# Altium PCB PCB2.PcbDoc
Units mm, origin at the board's own origin, x right, y up, seen from the top; angles counter-clockwise.
Board outline 32 x 16 mm, 2 copper layers (Top Layer, Bottom Layer); 10 components, 14 nets, 52 pads, 9 vias.
Unrouted connection lines stored in the file: 1.
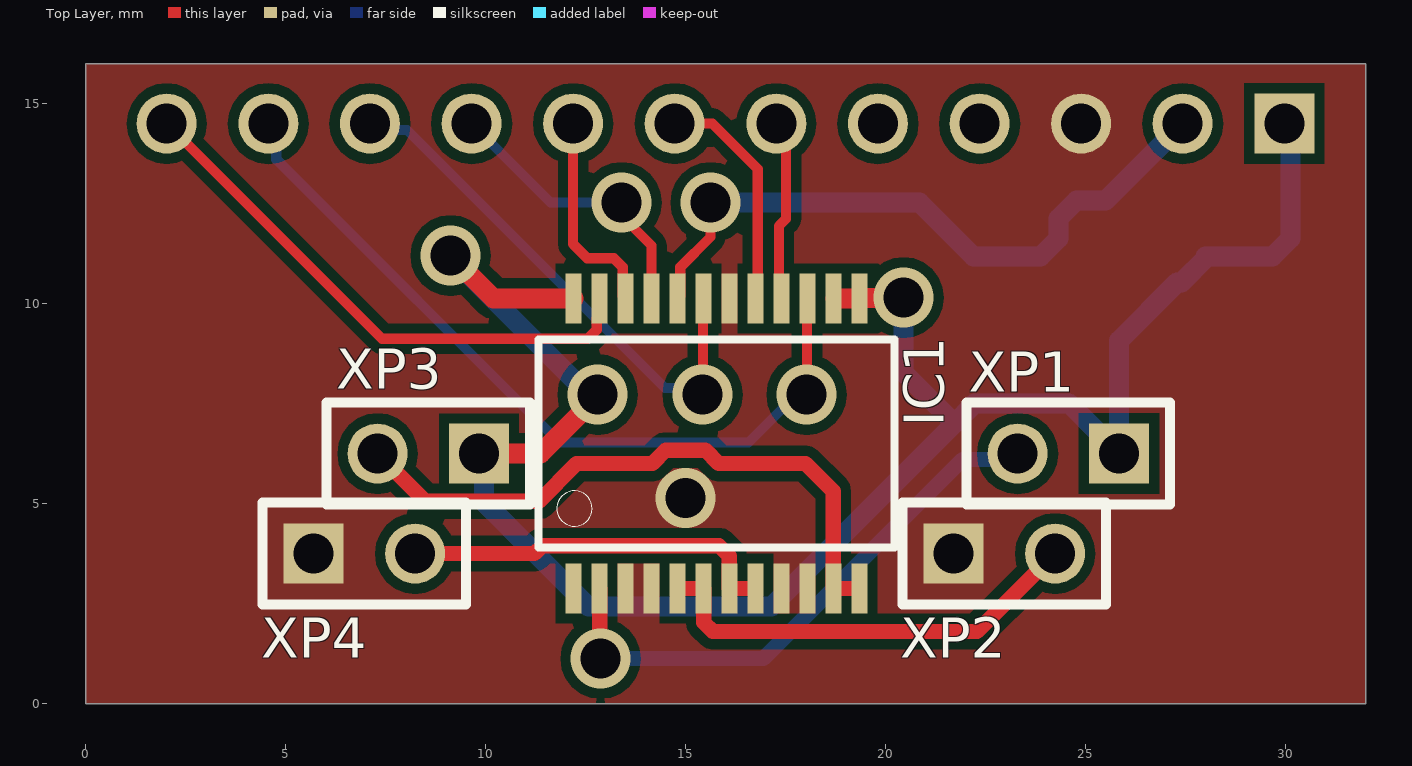
[diagram p0: Top Layer view]
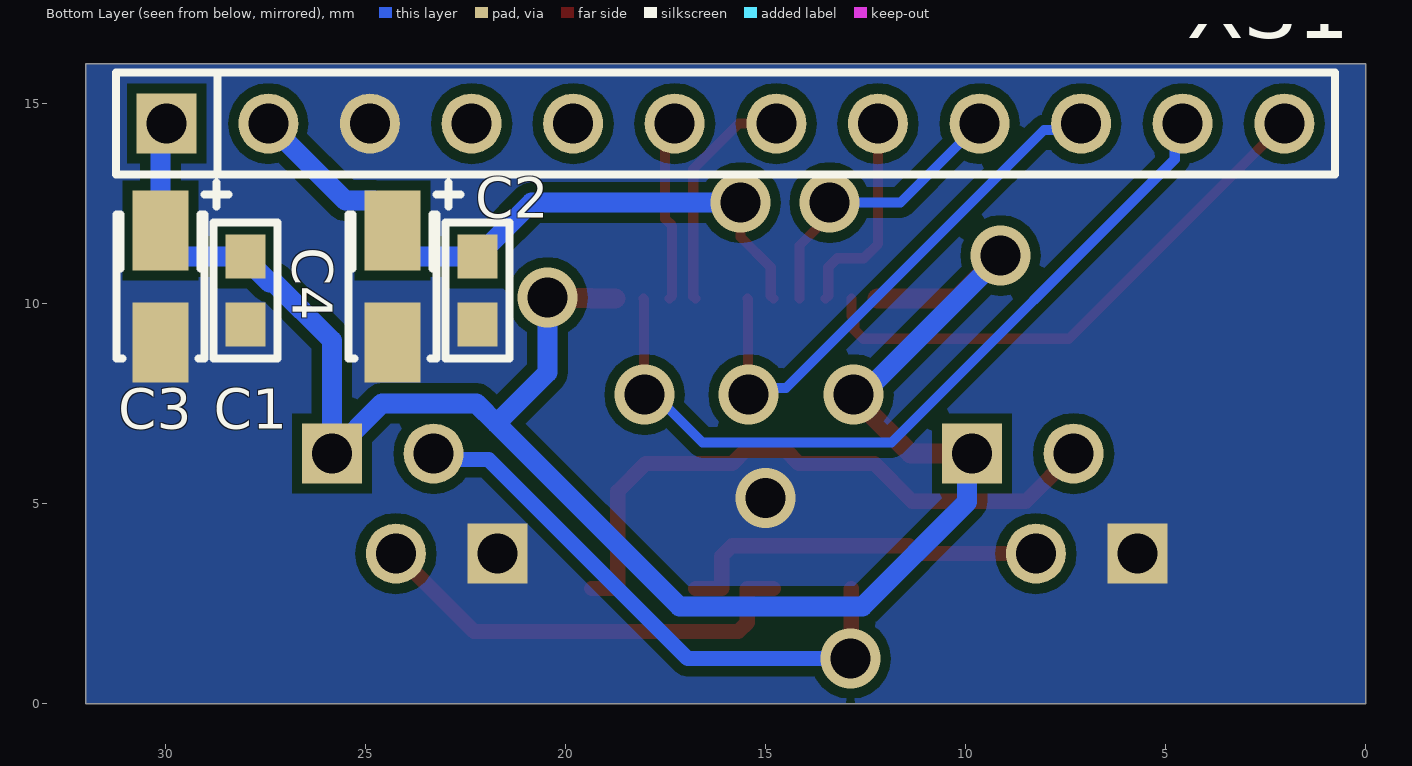
[diagram p1: Bottom Layer view, seen from below]
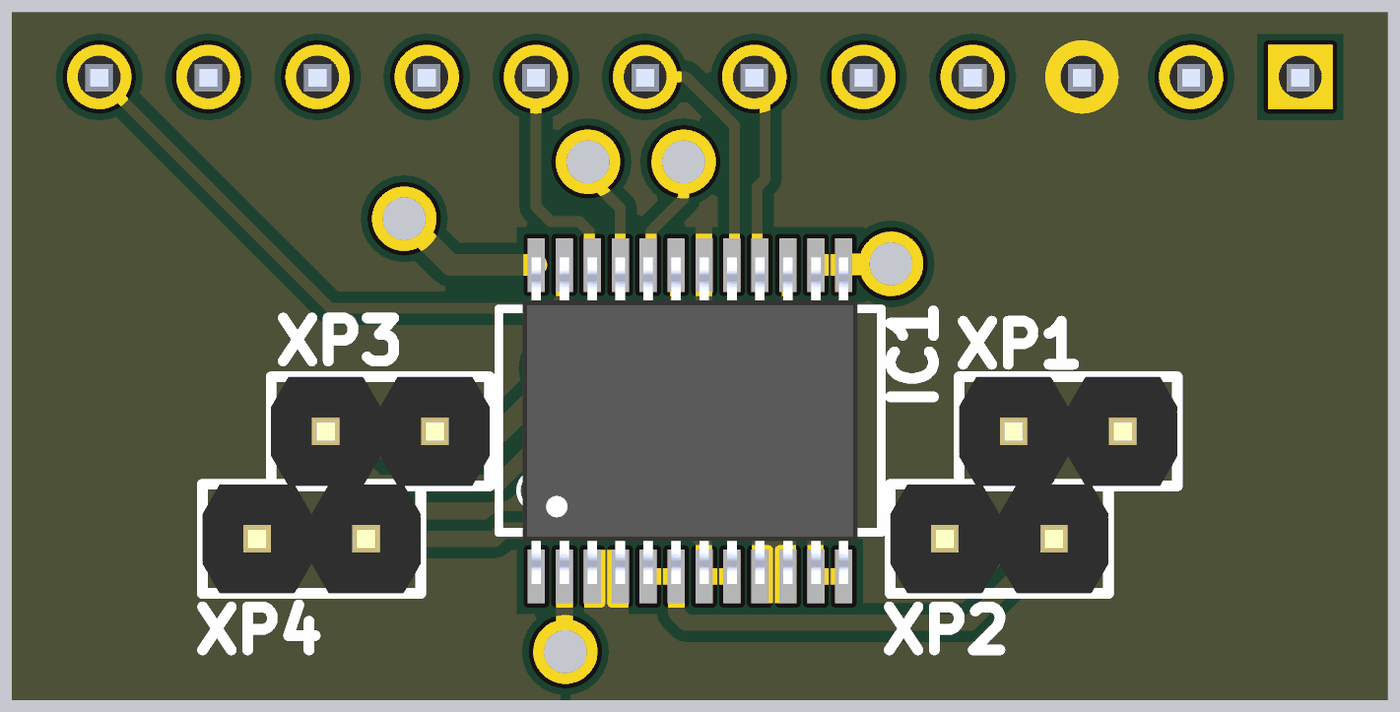
[diagram p2: 3D render of the assembled board from above, using the file's embedded part models]
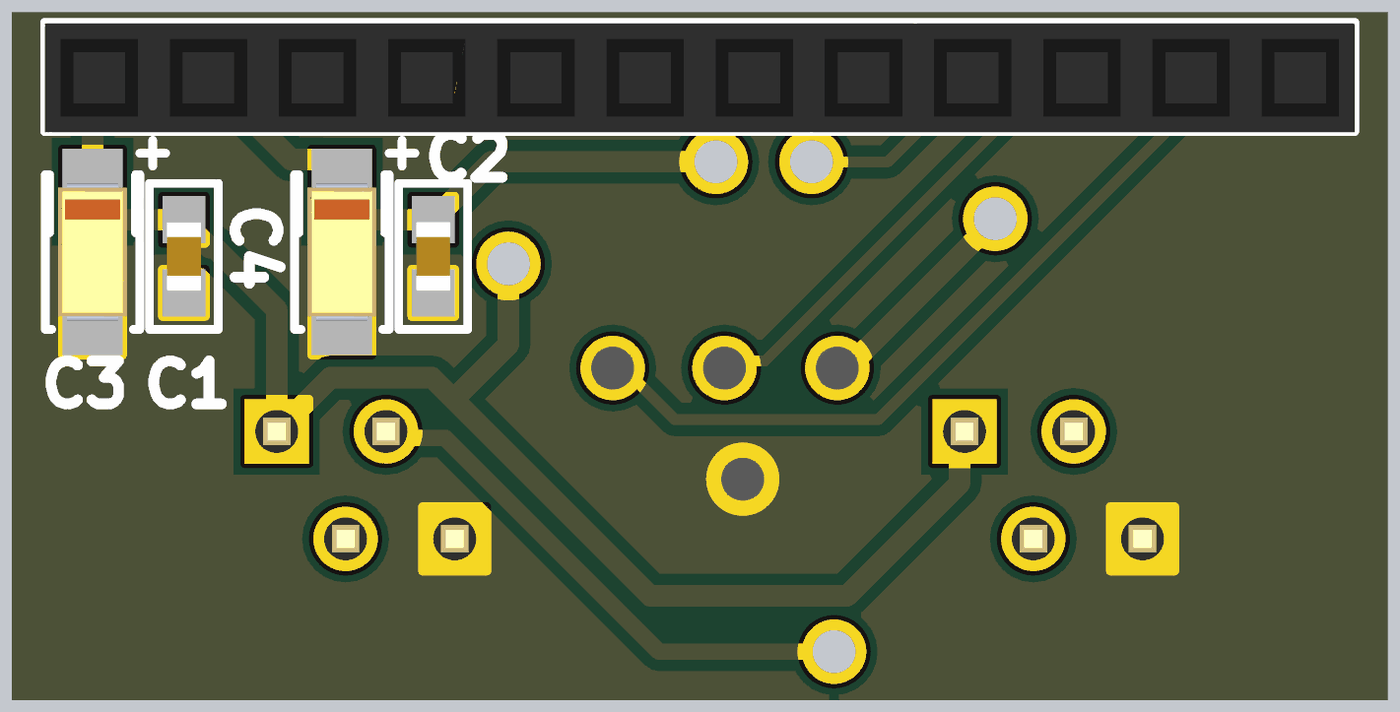
[diagram p3: 3D render of the assembled board from below, using the file's embedded part models]

## Layer stack, top to bottom
Top Solder: solder mask 0.0102, Solder Resist, Dk 3.5
Top Layer: signal copper 0.0356
Dielectric 1: dielectric 0.32, FR-4, Dk 4.8
Bottom Layer: signal copper 0.0356
Bottom Solder: solder mask 0.0102, Solder Resist, Dk 3.5

## Board outline
0,0 32,0 32,16 0,16

## Design rules (kind name [scope] priority, off if disabled: settings)
Clearance [All] p1: gap=0.254 ignorepadtopadclearanceinfootprint=FALSE except(0: Arc-Hole Track-Hole SMDPad-Hole THPad-Hole Via-Hole Fill-Hole Poly-Hole Region-Hole Text-Hole)
PolygonConnect [All] p1: connectstyle=Direct reliefconductorwidth=0.254 reliefentries=4 polygonreliefangle="90 Angle" airgapwidth=0.254
RoutingVias [All] p1: holewidth=0.711 width=1.27 viastyle="Through Hole" minholewidth=0.711 minwidth=1.27 maxholewidth=0.711 maxwidth=1.27
SolderMaskExpansion [All] p1: expansion=0.102 istentingtop=FALSE
Width [All] p1: maxlimit=0.5 minlimit=0.1 preferedwidth=0.254
30 further rules are at their usual default settings.

## Components (designator, comment, footprint, x,y, rotation, side; value= is the part's Value field where it differs from the comment)
C1 "Capacitor" C0603 28,10.325 r270 bottom value=0.1uF
C2 "Capacitor" C0603 22.2,10.325 r90 bottom value=0.1uF
C3 "Capacitor-T" C3216-p 30.125,10.425 r270 bottom value=10uF
C4 "Capacitor-T" C3216-p 24.325,10.425 r270 bottom value=10uF
IC1 "TB6612FNG" SSOP24 15.775,6.5 r0 top locked
XP1 "Motor(A)12" PLS-2 24.57,6.25 r180 top locked value=PLS-2
XP2 "Motor(A)11" PLS-2 22.97,3.75 r0 top locked value=PLS-2
XP3 "Motor(B)21" PLS-2 8.57,6.25 r180 top locked value=PLS-2
XP4 "Motor(B)22" PLS-2 6.97,3.75 r0 top locked value=PLS-2
XS1 "Text" PBS-12 16,14.5 r180 bottom locked value=Connector

## Footprints (in the part's own frame and the unit in brackets; to place one, negate y for a bottom-side part, rotate by r counter-clockwise, add the part's x,y. Pads: shape width x height; smd on the part's side, far side on the other; paste and mask are expansions set on the pad)
C0603 [mm] "1608M"
  rect 1.1x1 smd: 1(-0.85,0) 2(0.85,0)
  silkscreen extent -1.7,-0.8 1.7,0.8, body extent -0.8,-0.4 0.8,0.4, height 0.91
C3216-p [mm] "Type A"
  rect 2x1.4 smd: 1(-1.4,0) 2(1.4,0)
  silkscreen extent -2.6,-1.1 1.8,1.7, body extent -1.6,-0.8 1.6,0.8, height 1.8
PBS-12 [mm]
  rect 1.5x1.5 hole 1: 1(-13.97,0)
  round 1.5 hole 1: 2(-11.43,0) 3(-8.89,0) 4(-6.35,0) 5(-3.81,0) 6(-1.27,0) 7(1.27,0) 8(3.81,0) 9(6.35,0) 10(8.89,0) 11(11.43,0) 12(13.97,0)
  silkscreen extent -15.24,-1.27 15.24,1.27, body extent -15.24,-1.29 15.24,1.25, height 8.5
PLS-2 [mm]
  rect 1.5x1.5 hole 1: 1(-1.27,0)
  round 1.5 hole 1: 2(1.27,0)
  silkscreen extent -2.54,-1.27 2.54,1.27, body extent -2.54,-1.27 2.54,1.27, height 8.9
SSOP24 [mm]
  rect 0.4x1.25 smd: 1(-3.575,-3.625) 2(-2.925,-3.625) 3(-2.275,-3.625) 4(-1.625,-3.625) 5(-0.975,-3.625) 6(-0.325,-3.625) 7(0.325,-3.625) 8(0.975,-3.625) 9(1.625,-3.625) 10(2.275,-3.625) 11(2.925,-3.625) 12(3.575,-3.625) 13(3.575,3.625) 14(2.925,3.625) 15(2.275,3.625) 16(1.625,3.625) 17(0.975,3.625) 18(0.325,3.625) 19(-0.325,3.625) 20(-0.975,3.625) 21(-1.625,3.625) 22(-2.275,3.625) 23(-2.925,3.625) 24(-3.575,3.625)
  silkscreen extent -4.45,-2.6 4.45,2.6, body extent -3.9,-3.8 3.9,3.8, height 1.6

## Part data
C1 C2: library part GRM188R71C104KA01D, "0.1 uF", Dielectric Type=X7R, Manufacturer=Murata, Tolerance=±10%, Voltage=16V, Working Temperature Max=+125°С, Working Temperature Min=-55°С, Application Category=1, ID=131, Part Number=GRM188R71C104KA01D, Published=18.05.2010, Publisher="Andrew Danich", Type=Конденсатор
C3 C4: library part T491A106K006AT, "10 uF", Leakage Current=600nA, Manufacturer=Kemet, Tolerance=±10%, Voltage=6.3V, Working Temperature Max=+125°С, Working Temperature Min=-55°С, Application Category=1, ESR=4ohm, ID=25, Part Number=T491A106K006AT, Published=23.04.2010, Publisher="Andrew Danich", Type=Конденсатор
IC1: "Motor Driver Power MOSFET Parallel 24-SSOP", Package=None, Availability="In Stock", Check_prices=https://www.snapeda.com/parts/TB6612FNG/Toshiba/view-part/6765825/?ref=eda, MF=Toshiba, MP=TB6612FNG, Price=None, Purchase-URL=https://pricing.snapeda.com/search/part/TB6612FNG/?ref=eda, SnapEDA_Link=https://www.snapeda.com/parts/TB6612FNG/Toshiba/view-part/6765825/?ref=snap
XP1 XP2 XP3 XP4: library part PLS-2, Limit Current=3A, Limit Voltage=250V, Resistance=15momh, Connector Type=Male, ID=1, Part Number=PLS-2, Pins=2, Pitch=2.54mm, Published=07.03.2013, Publisher="Andrew Danich", Surface Finish=Gold, Type=Вилка
XS1: library part PBS-12, ID=63, Part Number=PBS-12, Published=07.03.2013, Publisher="Andrew Danich", Type=Розетка

## Via types
v1: diameter 1.5, hole 1, Top Layer to Bottom Layer, 9 vias

## Nets (pads, with @x,y where several pads share a name; then routed paths per layer and width w, separated by ;. In a path a pad name is that pad's centre, name@x,y a point inside that pad or via, vN(x,y) a via of type N, cw(c..) or ccw(c..) an arc to the next point about the centre after c; other vN are vias at no path point)
+7.4: C1.1 C3.1 IC1.13 IC1.14 IC1.24 XP1.1 XP3.1 XS1.1 | length 49.6
  Top Layer w0.5: v1(9.125,11.2) 10.2,10.125 IC1.24 ; XP3.1 11.375,6.25 v1@12.8,7.675 ; IC1.14@18.754,10.125 IC1.13 19.362,10.137 20.437,10.137 v1(20.45,10.15)
  Bottom Layer w0.5: v1(9.125,11.2) 9.125,11.175 12.625,7.675 v1@12.8,7.675 ; XP3.1 9.957,6.133 9.957,5.043 12.575,2.425 17.15,2.425 21.725,7 ; v1(20.45,10.15) 20.45,8.275 21.725,7 ; XS1.1 30.125,14.345 C3.1 30.125,11.625 29.675,11.175 C1.1 28,11.125 27.404,10.529 27.291,10.529 25.84,9.078 XP1.1 24.586,7.504 22.229,7.504 21.725,7
  other v1: 12.8,7.725
GND: C1.2 C2.1 C3.2 C4.2 IC1.3 IC1.4 IC1.9 IC1.10 IC1.18 XP2.1 XP4.1 XS1.3
  other v1: 15,5.139
NetIC1_1: IC1.1 IC1.2 XP1.2 | length 14.3
  Top Layer w0.381: IC1.2 12.856,2.869 12.856,1.144 v1(12.875,1.125)
  Bottom Layer w0.381: v1(12.875,1.125) 16.946,1.125 21.921,6.1 23.15,6.1 XP1.2
NetIC1_5: IC1.5 IC1.6 XP2.2 | length 11.2
  Top Layer w0.381: IC1.5 IC1.6 15.456,2.869 15.456,2.027 15.683,1.8 22.29,1.8 XP2.2
NetIC1_7: IC1.7 IC1.8 XP4.2 | length 9.5
  Top Layer w0.381: XP4.2 11.225,3.75 11.42,3.945 14.172,3.945 14.534,3.945 15.184,3.945 15.834,3.945 16.094,3.684 16.094,2.881 IC1.7 IC1.8
NetIC1_11: IC1.11 IC1.12 XP3.2 | length 15.9
  Top Layer w0.381: XP3.2 8.495,5.055 11.332,5.055 12.277,6 14.172,6 14.505,6.334 15.495,6.334 15.828,6 18,6 18.694,5.306 18.694,2.881 IC1.11 IC1.12
NetIC1_15: IC1.15 XS1.11 | length 20
  Top Layer w0.254: v1@18.038,7.788 18.038,10.112 IC1.15
  Bottom Layer w0.254: XS1.11 4.768,14.302 4.768,13.607 11.85,6.525 16.575,6.525 17.838,7.788 v1@18.038,7.788
  other v1: 18.025,7.725
NetIC1_16: IC1.16 XS1.6 | length 4.6
  Top Layer w0.254: XS1.6 17.514,14.256 17.514,12.121 17.335,11.942 17.335,10.19 IC1.16
NetIC1_17: IC1.17 XS1.7 | length 5.8
  Top Layer w0.254: XS1.7 15.671,14.5 16.806,13.365 16.806,10.181 IC1.17
NetIC1_19: IC1.19 XS1.10 | length 13.3
  Top Layer w0.254: v1@15.438,7.888 15.438,10.112 IC1.19
  Bottom Layer w0.254: XS1.10 7.273,14.337 8.038,14.337 14.488,7.888 v1@15.438,7.888
  other v1: 15.425,7.725
NetIC1_21: IC1.21 XS1.9 | length 7.2
  Top Layer w0.254: v1@13.35,12.525 13.35,12.25 14.15,11.45 IC1.21
  Bottom Layer w0.254: XS1.9 11.625,12.525 v1@13.35,12.525
  other v1: 13.4,12.525
NetIC1_22: IC1.22 XS1.8 | length 5.3
  Top Layer w0.254: XS1.8 12.19,11.485 12.544,11.131 13.208,11.131 13.431,10.908 13.431,10.194 IC1.22
NetIC1_23: IC1.23 XS1.12 | length 13.9
  Top Layer w0.254: XS1.12 7.411,9.119 12.558,9.119 12.781,9.342 12.781,9.627 12.85,9.696 IC1.23
VCC: C2.2 C4.1 IC1.20 XS1.2 | length 16.8
  Top Layer w0.254: IC1.20 14.869,10.194 14.869,10.908 15.625,11.664 v1(15.625,12.525)
  Bottom Layer w0.5: v1(15.625,12.525) 20.85,12.525 C2.2 23.875,11.175 24.325,11.625 C4.1 24.325,12.125 24.775,12.575 25.505,12.575 XS1.2
pads on no net: XS1.4 XS1.5

## Polygon pours and split planes (outlines as drawn)
GND on Bottom Layer "GND_L02_P000" (solid, pour order 0): 0,16 32,16 32,0 0,0
GND on Top Layer "GND_L01_P002" (solid, pour order 2): 0,16 32,16 32,0 0,0

## Silkscreen, mask and mechanical layers (free items; w line width, h text height)
Mechanical 1:
  the board outline again, w0.254